# Altium PCB XDRONE.PcbDoc (part 1 of 2)
Units mm, origin at the board's own origin, x right, y up, seen from the top; angles counter-clockwise.
Board outline 106 x 156 mm, 4 copper layers (Top Layer, Signal Layer 2, Signal Layer 1, Bottom Layer), stack 1.586 mm thick; 129 components, 64 nets, 369 pads, 526 vias.
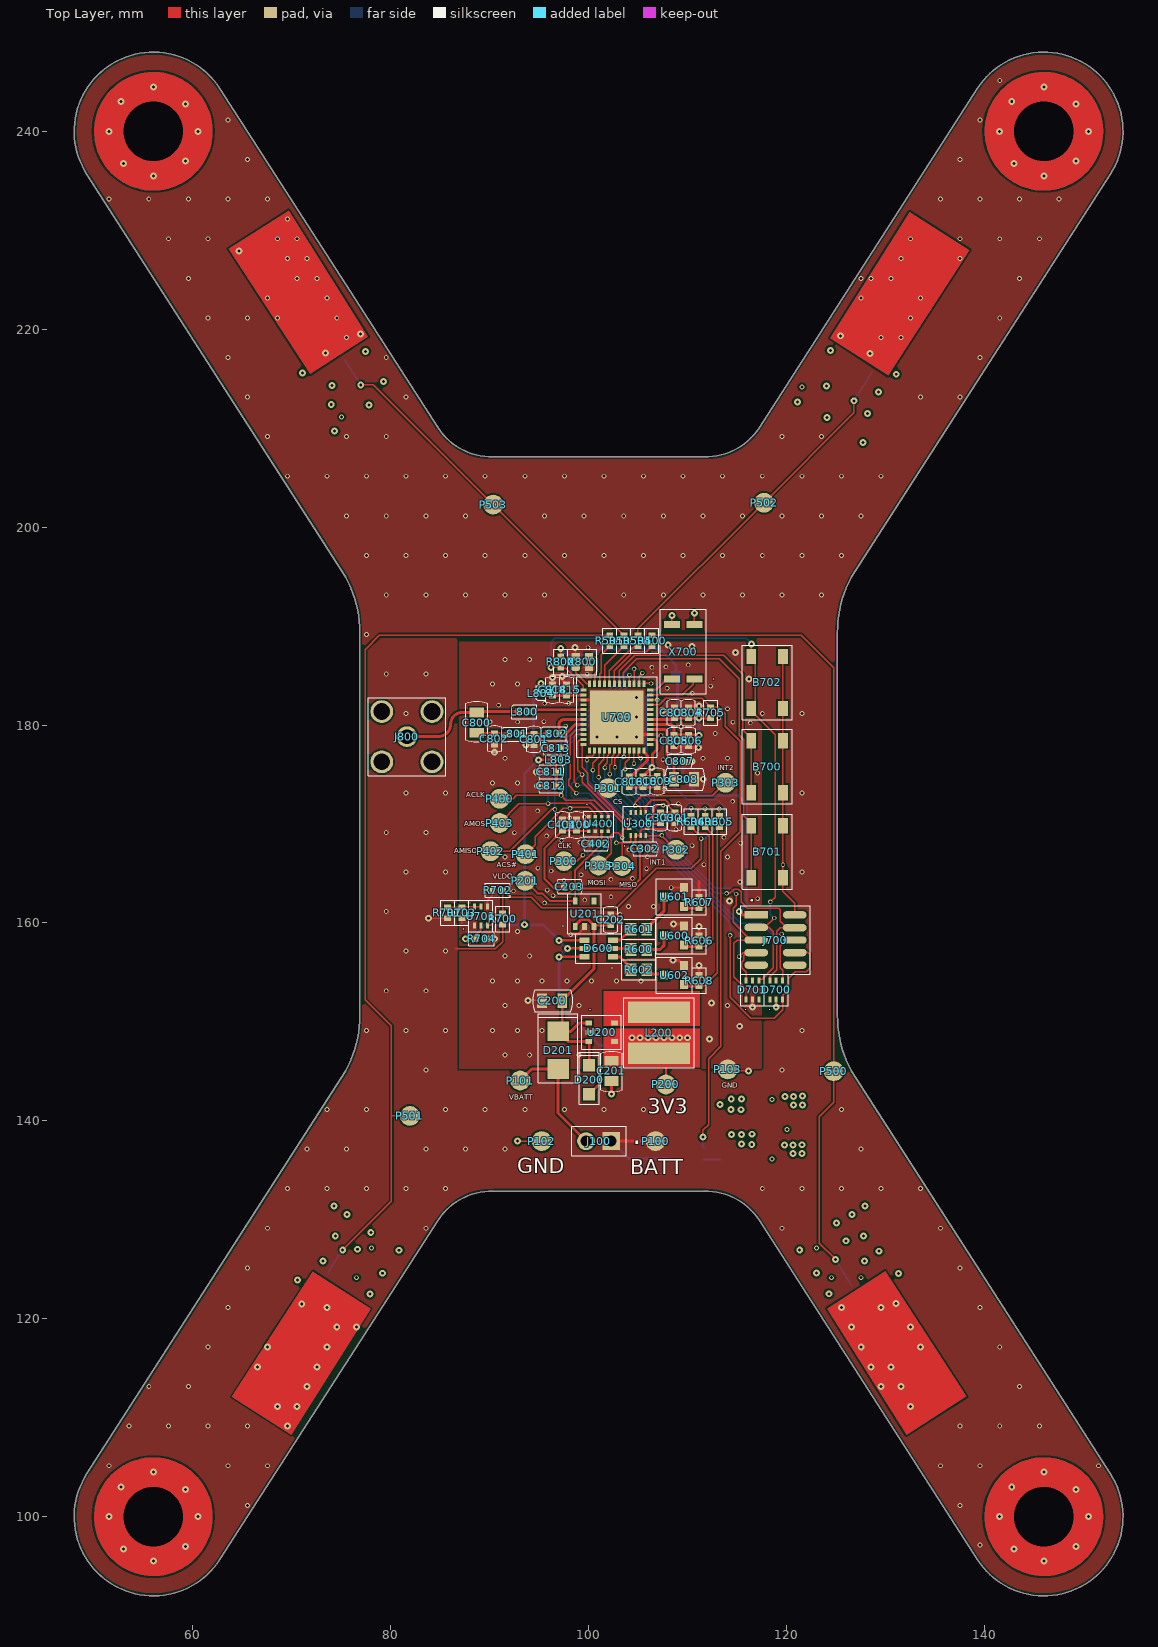
[diagram p0: Top Layer view]
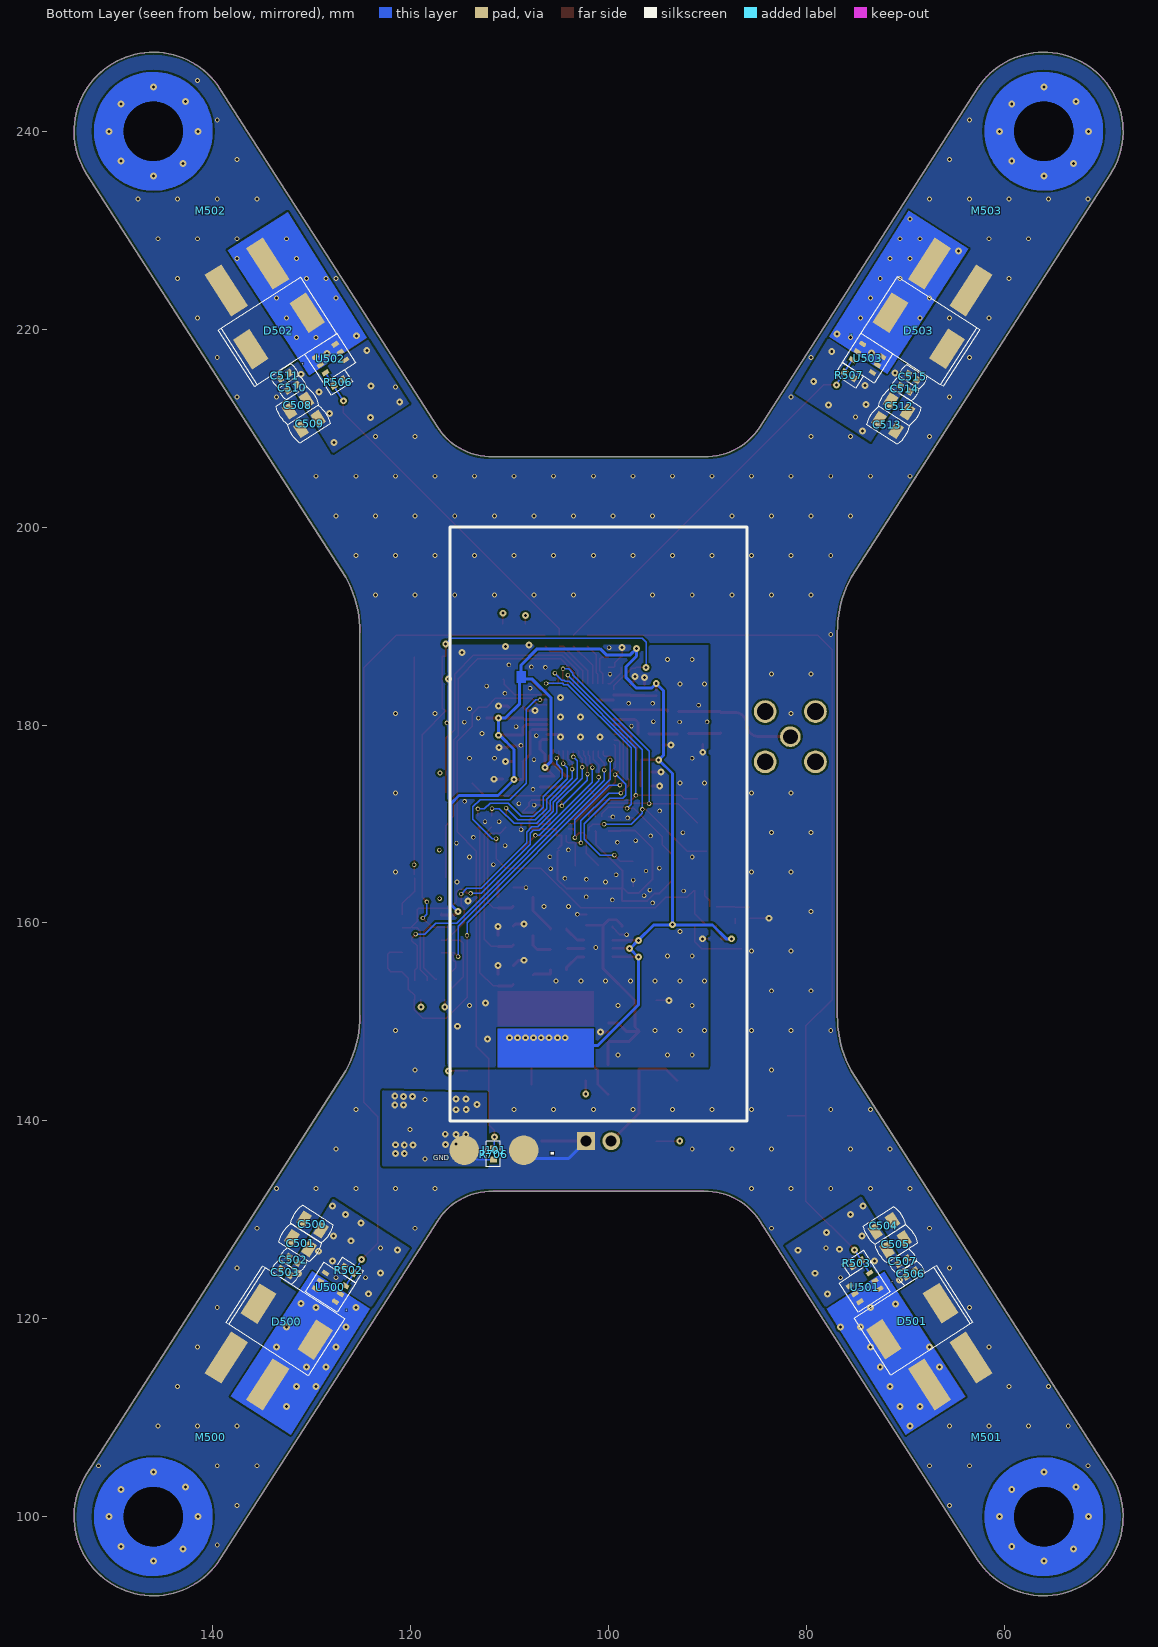
[diagram p1: Bottom Layer view, seen from below]
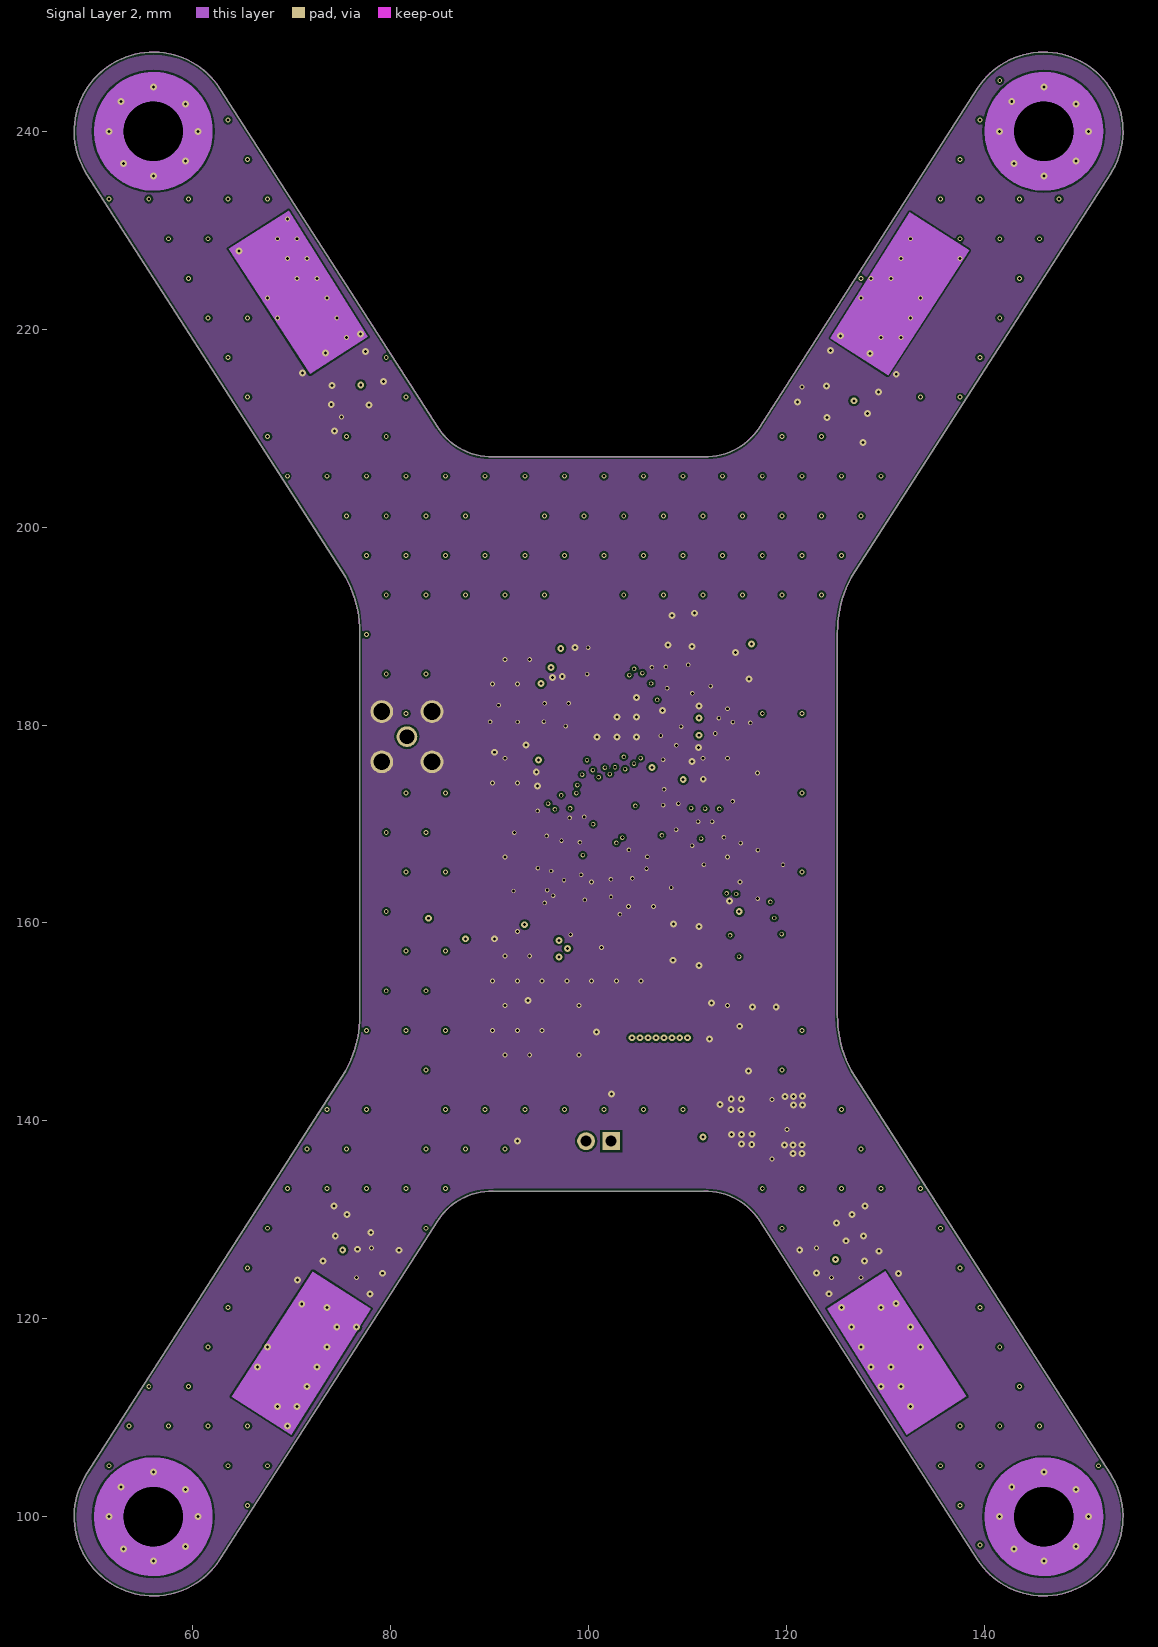
[diagram p2: Signal Layer 2]
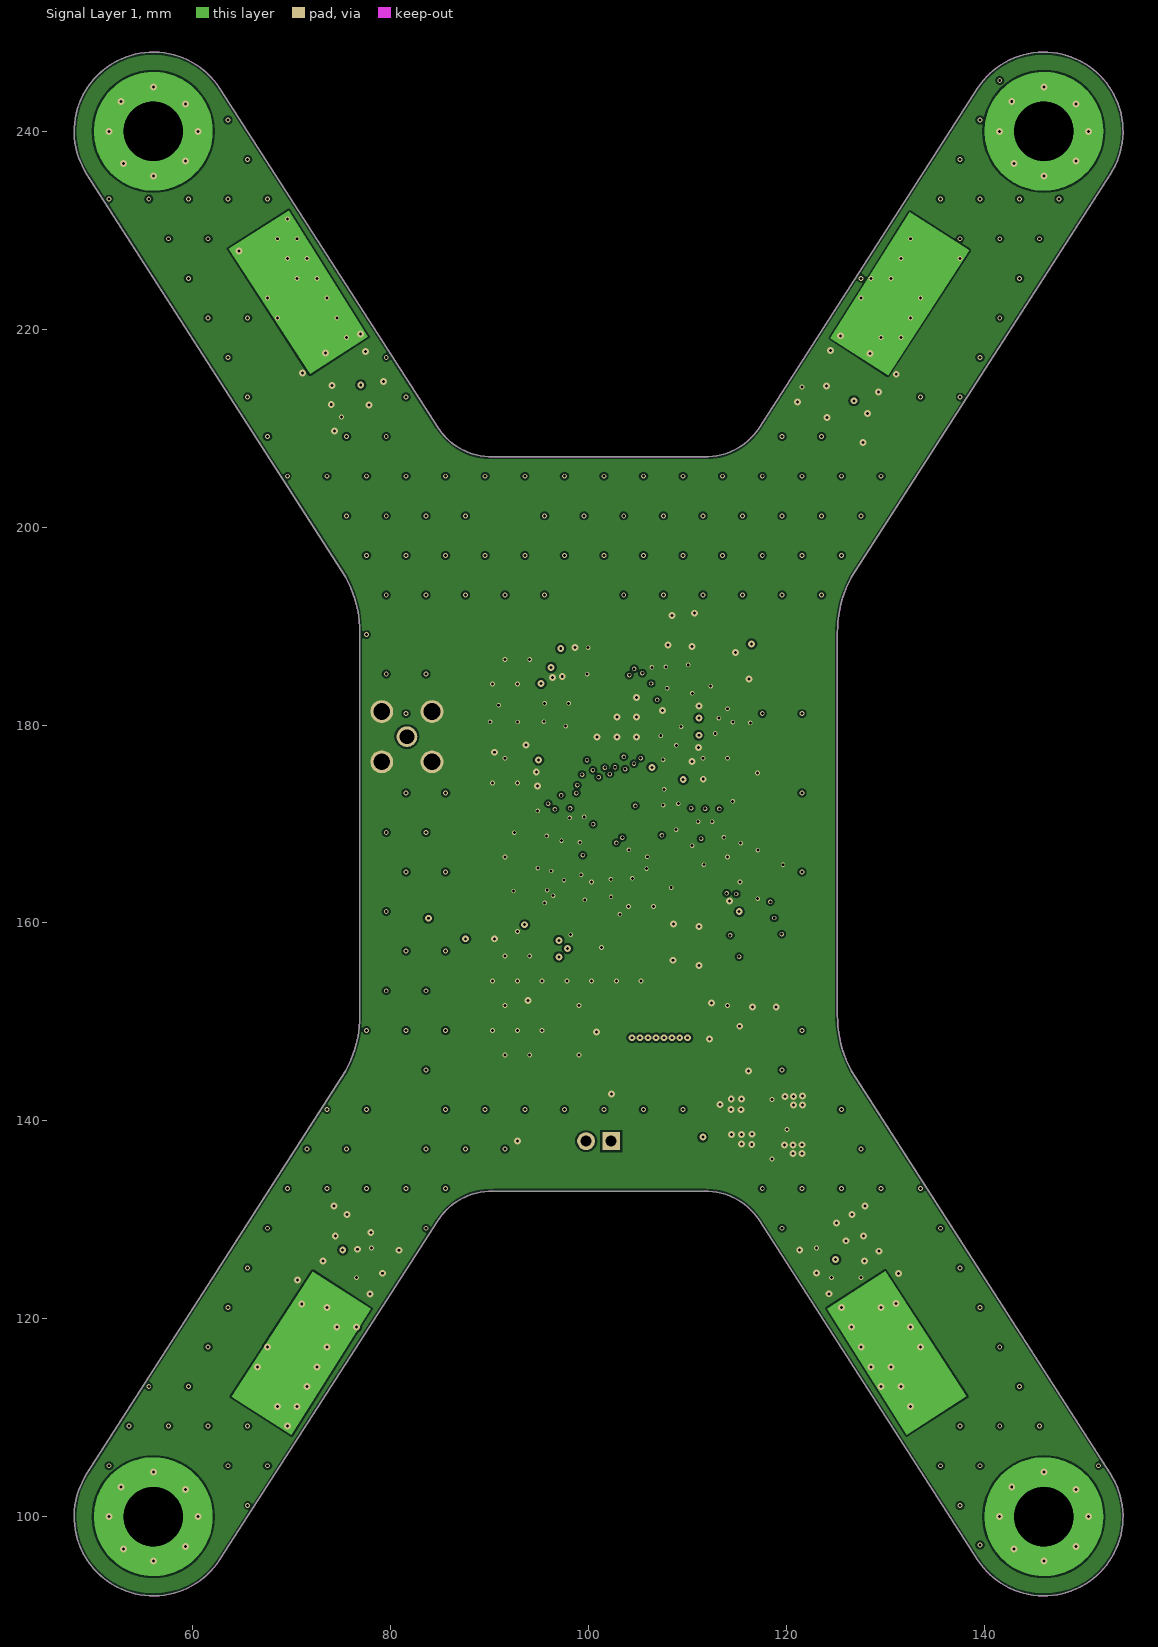
[diagram p3: Signal Layer 1]
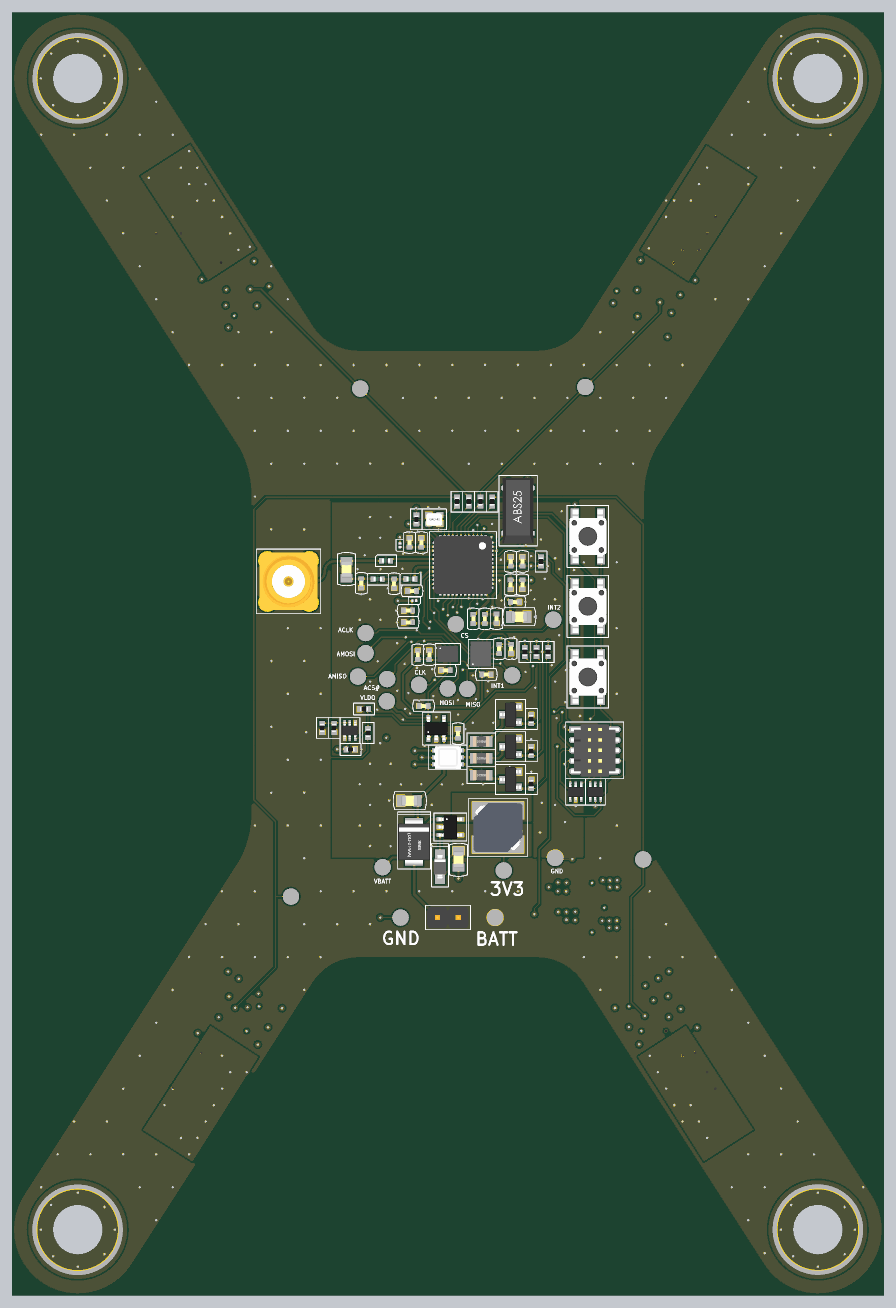
[diagram p5: 3D render of the assembled board from above, using the file's embedded part models]
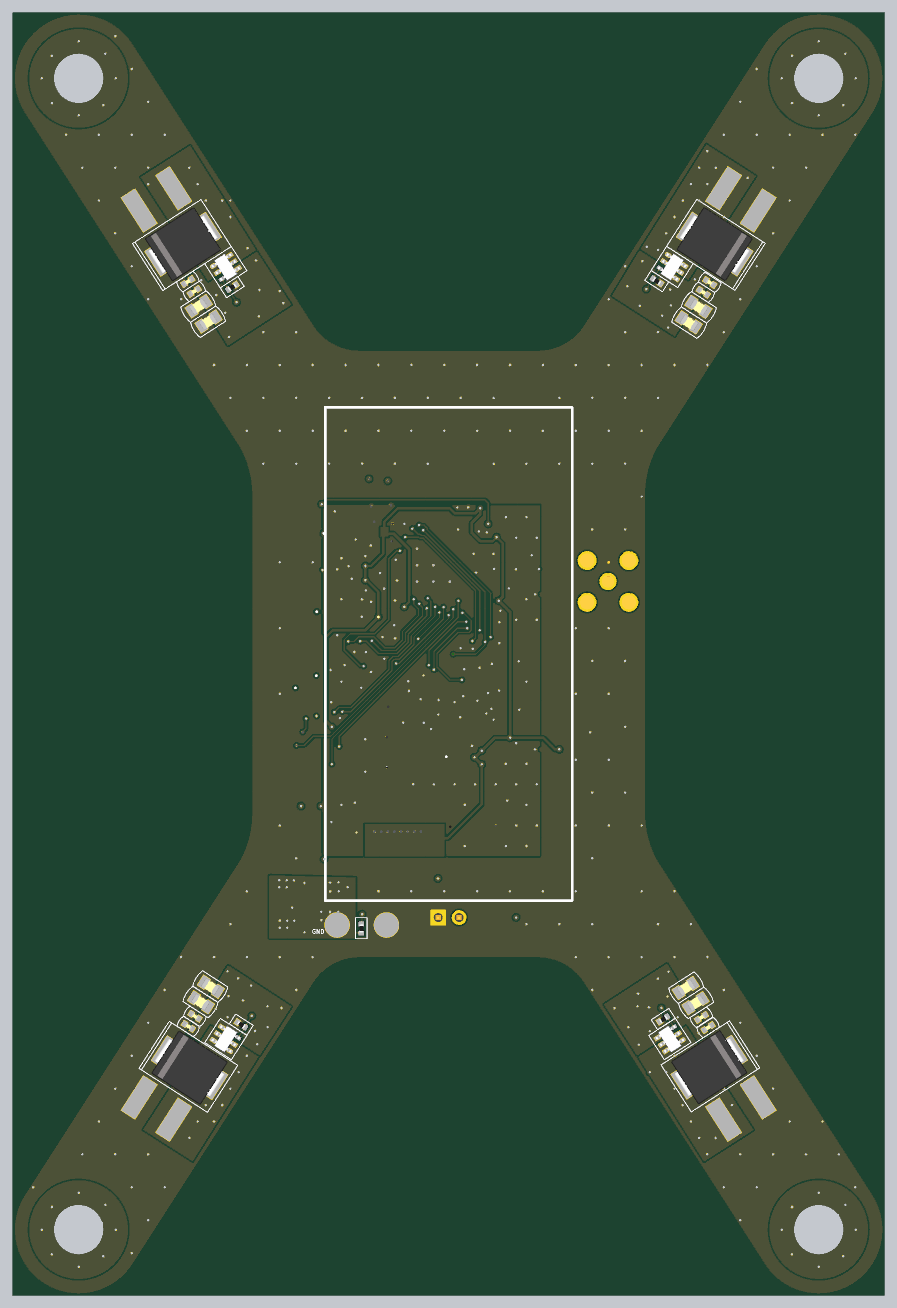
[diagram p6: 3D render of the assembled board from below, using the file's embedded part models]

## Layer stack, top to bottom
Top Solder: solder mask 0.0305, Solder Resist, Dk 3.8
Top Layer: signal copper 0.035
Dielectric 1: prepreg 0.2104, 7628*1, Dk 4.4
Signal Layer 2: signal copper 0.0152
Core: core 1.065, FR-4, Dk 4.6
Signal Layer 1: signal copper 0.0152
Dielectric 2: prepreg 0.2104, 7628*1, Dk 4.4
Bottom Layer: signal copper 0.035
Bottom Solder: solder mask 0.0305, Solder Resist, Dk 3.8

## Board outline
49.28,104.341 ccw(c56,100) 62.72,95.659 62.729,95.674 84.778,129.971 84.78,129.97 cw(c90.142,126.475) 90.352,132.872 111.648,132.872 cw(c111.858,126.475) 117.22,129.97 117.222,129.971 139.271,95.674 139.28,95.659 ccw(c146,100) 152.72,104.341 126.54,145.064 cw(c136.972,150.669) 125.13,150.67 125.13,189.33 cw(c136.972,189.331) 126.54,194.936 152.72,235.659 ccw(c146,240) 139.28,244.341 139.271,244.326 117.222,210.029 117.22,210.03 cw(c111.858,213.525) 111.648,207.128 90.352,207.128 cw(c90.142,213.525) 84.78,210.03 84.778,210.029 62.729,244.326 62.72,244.341 ccw(c56,240) 49.28,235.659 75.46,194.936 cw(c65.028,189.331) 76.87,189.33 76.87,150.67 cw(c65.028,150.669) 75.46,145.064

## Design rules (kind name [scope] priority, off if disabled: settings)
Clearance "Clearance Diff" [All] p1: gap=0.2 except(0.127: SMDPad-SMDPad)
ComponentClearance [All] p1: gap=0 collisioncheckmode=3 verticalgap=0.254 showdistances=FALSE
HoleSize [All] p1: absolutevalues=TRUE maxlimit=6.3 minlimit=0.3 maxpercent=80.000 minpercent=20.000
HoleToHoleClearance [All] p1: gap=0.5 allowstackedmicrovias=TRUE
MinimumAnnularRing "MinimumAnnularRing VIA" [IsVia] p1: minimumring=0.075
MinimumAnnularRing [All] p2: minimumring=0.3
MinimumSolderMaskSliver [All] p1: minsoldermaskwidth=0.08
PlaneConnect [All] p1: planeconnectstyle=Direct reliefexpansion=0.508 reliefentries=4 reliefconductorwidth=0.254 reliefairgap=0.254
PolygonConnect [All] p1: connectstyle=Direct reliefconductorwidth=0.254 reliefentries=4 polygonreliefangle="90 Angle" airgapwidth=0.254
RoutingVias [All] p1: holewidth=0.4 width=0.7 viastyle="Through Hole" minholewidth=0.3 minwidth=0.45 maxholewidth=1 maxwidth=2
SilkToSilkClearance [All] p1: silktosilkclearance=0
SilkToSolderMaskClearance [IsPad] p1: minsilkscreentomaskgap=0.15 clearancetoexposedcopper=TRUE
SolderMaskExpansion "SolderMaskExpansion MCU" [InComponent('U700')] p1: expansion=0.038
SolderMaskExpansion [All] p2: expansion=0.05
Width [All] p1: maxlimit=5 minlimit=0.09 preferedwidth=0.254
23 further rules are at their usual default settings.

## Classes and differential pairs
component class 01_XDRONE: J100 J101 P100 P101 P102 P103
component class U_02_POWER: C200 C201 C202 C203 D200 D201 L200 P200 P201 U200 U201
component class U_03_GYROSCOPE: C300 C301 C302 P300 P301 P302 P303 P304 P305 U300
component class U_04_ALTIMETER: C400 C401 C402 P400 P401 P402 P403 U400
component class U_05_MOTORS: C500 C501 C502 C503 C504 C505 C506 C507 C508 C509 C510 C511 C512 C513 C514 C515 D500 D501 D502 D503 M500 M501 M502 M503 P500 P501 P502 P503 R500 R501 R502 R503 R504 R505 R506 R507 U500 U501 U502 U503
component class U_06_LEDS: D600 R600 R601 R602 R603 R604 R605 R606 R607 R608 U600 U601 U602
component class U_07_MCU: B700 B701 B702 D700 D701 J700 R700 R701 R702 R703 R704 R705 R706 U700 U701 X700
component class U_08_MCU_POWER: C800 C801 C802 C803 C804 C805 C806 C807 C808 C809 C810 C811 C812 C813 C814 C815 C816 J800 L800 L801 L802 L803 L804 R800 X800

## Components (designator, comment, footprint, x,y, rotation, side; value= is the part's Value field where it differs from the comment)
B700 "BTN_1B_PTS647SK38SMTR2LFS" BTN_SMD 118.025,175.8 r270 top
B701 "BTN_1B_PTS647SK38SMTR2LFS" BTN_SMD 118.025,167.2 r270 top
B702 "BTN_1B_PTS647SK38SMTR2LFS" BTN_SMD 118.025,184.3 r270 top
C200 "4.7uF_10%_16V_0805_X7R_GRM21BR71C475KE51L" CAP_0805 96.3,152.15 r0 top
C201 "10uF_20%_6.3V_0805_X5R_JMK212BJ106MG-T" CAP_0805 102.3,145.05 r270 top
C202 "1uF_10%_35V_0402_GRM155R6YA105KE11J" CAP_0402 102.23,160.32 r270 top
C203 "1uF_10%_35V_0402_GRM155R6YA105KE11J" CAP_0402 98.05,163.67 r0 top
C300 "10uF_20%_6.3V_0402_GRM155R60J106ME05D" CAP_0402 107.25,170.625 r90 top
C301 "100nF_10%_16V_0402_GRM155R71C104KA88J" CAP_0402 108.7,170.625 r90 top
C302 "100nF_10%_16V_0402_GRM155R71C104KA88J" CAP_0402 105.68,167.5 r0 top
C400 "10uF_20%_6.3V_0402_GRM155R60J106ME05D" CAP_0402 98.75,169.9 r270 top
C401 "100nF_10%_16V_0402_GRM155R71C104KA88J" CAP_0402 97.35,169.9 r270 top
C402 "100nF_10%_16V_0402_GRM155R71C104KA88J" CAP_0402 100.725,168.025 r180 top
C500 "10uF_10%_10V_0805_X6S_GRM21BC81C106KA73L" CAP_0805 129.92,129.53 r32.73 bottom
C501 "10uF_10%_10V_0805_X6S_GRM21BC81C106KA73L" CAP_0805 131.12,127.64 r32.73 bottom
C502 "100nF_10%_16V_0402_GRM155R71C104KA88J" CAP_0402 131.85,125.95 r32.73 bottom
C503 "100pF_5%_50V_0402_CC0402JRNPO9BN101" CAP_0402 132.65,124.72 r32.73 bottom
C504 "10uF_10%_10V_0805_X6S_GRM21BC81C106KA73L" CAP_0805 72.18,129.38 r147.26 bottom
C505 "10uF_10%_10V_0805_X6S_GRM21BC81C106KA73L" CAP_0805 70.98,127.53 r147.26 bottom
C506 "100nF_10%_16V_0402_GRM155R71C104KA88J" CAP_0402 69.45,124.57 r147.26 bottom
C507 "100pF_5%_50V_0402_CC0402JRNPO9BN101" CAP_0402 70.26,125.81 r147.26 bottom
C508 "10uF_10%_10V_0805_X6S_GRM21BC81C106KA73L" CAP_0805 131.39,212.3 r327.26 bottom
C509 "10uF_10%_10V_0805_X6S_GRM21BC81C106KA73L" CAP_0805 130.2,210.44 r327.26 bottom
C510 "100nF_10%_16V_0402_GRM155R71C104KA88J" CAP_0402 131.94,214.1 r327.26 bottom
C511 "100pF_5%_50V_0402_CC0402JRNPO9BN101" CAP_0402 132.72,215.29 r327.26 bottom
C512 "10uF_10%_10V_0805_X6S_GRM21BC81C106KA73L" CAP_0805 70.63,212.21 r212.74 bottom
C513 "10uF_10%_10V_0805_X6S_GRM21BC81C106KA73L" CAP_0805 71.81,210.33 r212.74 bottom
C514 "100nF_10%_16V_0402_GRM155R71C104KA88J" CAP_0402 70.04,213.99 r212.74 bottom
C515 "100pF_5%_50V_0402_CC0402JRNPO9BN101" CAP_0402 69.25,215.18 r212.74 bottom
C800 "220pF_5%_50V_0805_C0G,NP0_QSCT251Q221J1GV001E" CAP_0805 88.675,180.25 r90 top
C801 "6.3pF_1.5%_50V_0402_CBR04C639B5GAC" CAP_0402 94.475,178.55 r90 top
C802 "2.1pF_5%_50V_0402_GJM1555C1H2R1BB01D" CAP_0402 90.475,178.6 r270 top
C803 "100nF_10%_16V_0402_GRM155R71C104KA88J" CAP_0402 108.65,181.25 r90 top
C804 "1uF_10%_35V_0402_GRM155R6YA105KE11J" CAP_0402 110.075,181.25 r90 top
C805 "1uF_10%_35V_0402_GRM155R6YA105KE11J" CAP_0402 108.625,178.425 r270 top
C806 "10nF_10%_6.3V_0402_CC0402KRX7R5BB103" CAP_0402 110.075,178.425 r270 top
C807 "100nF_10%_16V_0402_GRM155R71C104KA88J" CAP_0402 109.175,176.325 r0 top
C808 "2.7uF_10%_10V_0805_X5R_C0805C275K8PAC7800" CAP_0805 109.625,174.525 r0 top
C809 "10uF_20%_6.3V_0402_GRM155R60J106ME05D" CAP_0402 106.925,174.3 r270 top
C810 "100nF_10%_16V_0402_GRM155R71C104KA88J" CAP_0402 105.5,174.275 r270 top
C811 "100pF_5%_50V_0402_CC0402JRNPO9BN101" CAP_0402 96.175,175.275 r0 top
C812 "470nF_10%_6.3V_0402_GRM155C80J474KE19D" CAP_0402 96.175,173.85 r0 top
C813 "100pF_5%_50V_0402_CC0402JRNPO9BN101" CAP_0402 96.65,177.675 r0 top
C814 "1uF_10%_35V_0402_GRM155R6YA105KE11J" CAP_0402 96.35,183.55 r270 top
C815 "100pF_5%_50V_0402_CC0402JRNPO9BN101" CAP_0402 97.775,183.55 r270 top
C816 "1uF_10%_35V_0402_GRM155R6YA105KE11J" CAP_0402 104.1,174.275 r90 top
D200 "DIODE_30V_500mA_340mVf_CUS05S30,H3F" SOD-323 100.05,144.15 r90 top
D201 "DIODE_15V_1A_210mVf_VS-10BQ015HM3/5BT" DO-214AA 96.9,147.15 r270 top
D500 "DIODE_600V_8A_1Vf_S8JC" DO-214AB 132.51,119.7 r32.73 bottom
D501 "DIODE_600V_8A_1Vf_S8JC" DO-214AB 69.32,119.75 r147.26 bottom
D502 "DIODE_600V_8A_1Vf_S8JC" DO-214AB 133.3,219.825 r327.26 bottom
D503 "DIODE_600V_8A_1Vf_S8JC" DO-214AB 68.65,219.85 r212.74 bottom
D600 "LED_PLCC6_RGB_150352M173300" 6-PLCC 101.01,157.42 r180 top
D700 "ESD_D3V3F4U6S" "SOT-363 SC-70-6" 118.95,153.225 r90 top
D701 "ESD_D3V3F4U6S" "SOT-363 SC-70-6" 116.55,153.225 r90 top
J100 "CON_2x1PIN_ST_61300211121_2.54" CON_2x1PIN_RA_61300211121 101,137.95 r0 top
J101 "CON_2x1PIN_MALE_51005-0200" CON_2x1PIN_MOLEX_51005-0200 111.57,137.04 r270 bottom
J700 "CON_5x2PIN_RA_1.27_FTSH-105-01-L-DV-K" CON_5x2PIN_RA_FTSH-105-01-L-DV-K 118.875,158.275 r270 top
J800 "RF_63012002124503" RF_63012002124503 81.625,178.825 r90 top
L200 "10uH_30%_1.3A_CDRH5D28-100NC" IND_CDRH5D28 107.1,148.9 r270 top
L800 "18nH_2%_400mA_LQG15HS18NG02D" RF_IND_0402 93.475,181.35 r0 top
L801 "16nH_3%_400mA_MLG1005S16NHT000" RF_IND_0402 92.475,179.1 r0 top
L802 "4.2nH_5%_1.8A_LQW15AN4N2C8ZD" RF_IND_0402 96.45,179.125 r0 top
L803 "52nH_25%_750mA_BLM03PG330SN1" IND_0201 96.925,176.475 r180 top
L804 "110nH_50%_200mA_BLM03AG700SN1D" IND_0201 95.175,183.225 r90 top
M500 "BDC_1020_3.7V_4A" 1020_MOTOR 146,100 r122.73 bottom locked
M501 "BDC_1020_3.7V_4A" 1020_MOTOR 56,100 r57.27 bottom locked
M502 "BDC_1020_3.7V_4A" 1020_MOTOR 146,240 r237.26 bottom locked
M503 "BDC_1020_3.7V_4A" 1020_MOTOR 56,240 r302.74 bottom locked
P100 "TEST_POINT_2mm" TEST_POINT_2mm 106.75,137.95 r90 top
P101 "TEST_POINT_2mm" TEST_POINT_2mm 93.075,144.075 r90 top
P102 "TEST_POINT_2mm" TEST_POINT_2mm 95.25,137.95 r90 top
P103 "TEST_POINT_2mm" TEST_POINT_2mm 114.05,145.2 r90 top
P200 "TEST_POINT_2mm" TEST_POINT_2MM 107.8,143.675 r0 top
P201 "TEST_POINT_2mm" TEST_POINT_2mm 93.59,164.25 r90 top
P300 "TEST_POINT_2mm" TEST_POINT_2MM 97.5,166.25 r90 top
P301 "TEST_POINT_2mm" TEST_POINT_2MM 101.975,173.625 r90 top
P302 "TEST_POINT_2mm" TEST_POINT_2MM 108.825,167.4 r90 top
P303 "TEST_POINT_2mm" TEST_POINT_2MM 113.825,174.175 r90 top
P304 "TEST_POINT_2mm" TEST_POINT_2MM 103.375,165.75 r90 top
P305 "TEST_POINT_2mm" TEST_POINT_2MM 101,165.8 r90 top
P400 "TEST_POINT_2mm" TEST_POINT_2MM 91,172.55 r90 top
P401 "TEST_POINT_2mm" TEST_POINT_2MM 93.625,166.95 r90 top
P402 "TEST_POINT_2mm" TEST_POINT_2MM 90.075,167.25 r90 top
P403 "TEST_POINT_2mm" TEST_POINT_2MM 91,170.1 r90 top
P500 "TEST_POINT_2mm" TEST_POINT_2mm 124.76,145.02 r90 top
P501 "TEST_POINT_2mm" TEST_POINT_2mm 81.925,140.5 r90 top
P502 "TEST_POINT_2mm" TEST_POINT_2mm 117.72,202.47 r0 top
P503 "TEST_POINT_2mm" TEST_POINT_2mm 90.35,202.275 r0 top
R500 "RES_100R_1%_0402_RC0402FR-07100RL" RES_0402 106.4,188.525 r270 top
R501 "RES_100R_1%_0402_RC0402FR-07100RL" RES_0402 102.125,188.525 r270 top
R502 "RES_11k_5%_0402_ERJ-2GEJ113X" RES_0402 126.23,124.92 r32.73 bottom
R503 "RES_11k_5%_0402_ERJ-2GEJ113X" RES_0402 74.9,125.6 r327.26 bottom
R504 "RES_100R_1%_0402_RC0402FR-07100RL" RES_0402 104.975,188.525 r270 top
R505 "RES_100R_1%_0402_RC0402FR-07100RL" RES_0402 103.55,188.525 r270 top
R506 "RES_11k_5%_0402_ERJ-2GEJ113X" RES_0402 127.33,214.62 r147.26 bottom
R507 "RES_11k_5%_0402_ERJ-2GEJ113X" RES_0402 75.69,215.35 r212.74 bottom
R600 "RC_0805_340R_1/4W_1%_M" RES_0805 105.06,157.32 r180 top
R601 "RC_0805_340R_1/4W_1%_M" RES_0805 105.06,159.37 r180 top
R602 "RC_0805_340R_1/4W_1%_M" RES_0805 105.06,155.27 r180 top
R603 "RES_1k_1%_0402_RC0402FR-071KL" RES_0402 111.775,170.25 r90 top
R604 "RES_1k_1%_0402_RC0402FR-071KL" RES_0402 110.35,170.25 r90 top
R605 "RES_1k_1%_0402_RC0402FR-071KL" RES_0402 113.2,170.25 r90 top
R606 "RES_11k_5%_0402_ERJ-2GEJ113X" RES_0402 111.15,158.18 r90 top
R607 "RES_11k_5%_0402_ERJ-2GEJ113X" RES_0402 111.15,162.08 r90 top
R608 "RES_11k_5%_0402_ERJ-2GEJ113X" RES_0402 111.15,154.18 r90 top
R700 "RES_10k_1%_0402_RC0402FR-0710KL" RES_0402 91.3,160.4 r90 top
R701 "RES_1k_1%_0402_RC0402FR-071KL" RES_0402 85.725,161.025 r90 top
R702 "RES_10k_1%_0402_RC0402FR-0710KL" RES_0402 90.8,163.3 r180 top
R703 "RES_11k_5%_0402_ERJ-2GEJ113X" RES_0402 87.175,161.025 r270 top
R704 "RES_11k_5%_0402_ERJ-2GEJ113X" RES_0402 89.175,158.4 r0 top
R705 "RES_10k_1%_0402_RC0402FR-0710KL" RES_0402 112.325,181.25 r90 top
R706 "THER_10k_1%_0402_NTCG103JF103FT1" RES_0402 111.62,136.64 r270 bottom
R800 "RES_11k_5%_0402_ERJ-2GEJ113X" RES_0402 97.175,186.375 r270 top
U200 "DCDC_6VIN_3.3VOUT_600mA_TPS62203DBVR" "SC-74A-5 SOT-23-5" 101.3,148.95 r0 top
U201 "LDO_6Vin_3.3Vout_MIC5504-3.3YM5-TR" "SC-74A-5 SOT-23-5" 99.59,160.93 r90 top
U300 "GYRO_3D_3.6V_ACEL_ASM330LHH" LGA14 105,170 r90 top
U400 "BAR_4V_0.002hPA_500nA_DPS368XTSA1" DPS368XTSA1 101,170 r90 top
U500 "MOS_N_1G_20VDS_6.9A_0.65Vth_PMN16XNEX" TSSOP-6 128.1,123.175 r32.73 bottom
U501 "MOS_N_1G_20VDS_6.9A_0.65Vth_PMN16XNEX" TSSOP-6 74.1,123.175 r327.26 bottom
U502 "MOS_N_1G_20VDS_6.9A_0.65Vth_PMN16XNEX" TSSOP-6 128.11,217.04 r147.26 bottom
U503 "MOS_N_1G_20VDS_6.9A_0.65Vth_PMN16XNEX" TSSOP-6 73.82,217.07 r212.74 bottom
U600 "MOS_N_1G_0.3A_DMN2005K" SOT-23 108.625,158.73 r180 top
U601 "MOS_N_1G_0.3A_DMN2005K" SOT-23 108.625,162.63 r180 top
U602 "MOS_N_1G_0.3A_DMN2005K" SOT-23 108.625,154.73 r180 top
U700 "MCU_1MB_256kB_EFR32FG28A120F1024GM48-A" QFN48 102.85,180.8 r270 top
U701 "MOS_2G_50VDS_360mA_0.8Vth_DMN53D0LDW-7" "SOT-363 SC-70-6" 89.1,160.7 r90 top
X700 "QUARTZ_32.768kHz_20ppm_830016178" 4-SOJ 109.55,187.425 r90 top
X800 "QUARTZ_39MHz_10ppm_ECS-390-10-37B-CKM-TR" 4-SMD 99.35,186.375 r0 top

## Footprints (in the part's own frame and the unit in brackets; to place one, negate y for a bottom-side part, rotate by r counter-clockwise, add the part's x,y. Pads: shape width x height; smd on the part's side, far side on the other; paste and mask are expansions set on the pad)
4-SMD [mm] "4-SMD"
  rrect50% 0.85x0.75 smd: 1(-0.675,-0.525)
  rect 0.85x0.75 smd: 2(0.675,-0.525) 3(0.675,0.525) 4(-0.675,0.525)
  silkscreen extent -1.47,-1.27 1.48,1.28, body extent -1,-0.8 1,0.8, height 0.51
4-SOJ [mm] "4-SOJ"
  rect 0.7x1.6 smd: 1(-2.75,-1.15) 2(2.75,-1.15) 3(2.75,1.15) 4(-2.75,1.15)
  silkscreen extent -4.28,-2.32 4.28,2.32, body extent -4,-1.99 4,2.01, height 2.65
6-PLCC [mm] "6-PLCC"
  rect 1x0.55 smd: 1(-1.45,0.85) 2(1.45,0.85) 3(-1.45,0) 4(1.45,0) 5(-1.45,-0.85) 6(1.45,-0.85)
  silkscreen extent -2.32,-1.5 2.32,1.5, body extent -1.75,-1.4 1.75,1.4, height 1.85
1020_MOTOR [mm] "1020_Motor"
  round 0 hole 6 unplated: 0(0,0)
  rect 5x2 smd: 1(17.5,2.5) 2(17.5,-2.5)
BTN_SMD [mm] "BTN_SMD"
  rect 1.55x1 smd: 1(-2.625,1.6) 2(2.625,1.6) 3(-2.625,-1.6) 4(2.625,-1.6)
  silkscreen extent -3.77,-2.52 3.77,2.52, body extent -3.25,-2.25 3.25,2.25, height 3.8
CAP_0402 [mm] "CAP_0402"
  rect 0.6x0.7 smd: 1(-0.55,0) 2(0.55,0)
  silkscreen extent -1.32,-0.7 1.32,0.72, body extent -0.5,-0.25 0.5,0.25, height 0.5
CAP_0805 [mm] "CAP_0805"
  rect 1x1.45 smd: 1(-1.025,0) 2(1.025,0)
  silkscreen extent -1.95,-1.1 2.1,1.1, body extent -0.92,-0.62 1.08,0.63, height 0.63
CON_2x1PIN_MOLEX_51005-0200 [mm] "CON_2x1PIN_MOLEX_51005-0200"
  round 3 smd: 1(0,3) 2(0,-3)
CON_2x1PIN_RA_61300211121 [mm] "CON_2x1PIN_RA_61300211121"
  rect 1.8x1.8 hole 1.1: 1(1.27,0)
  round 1.8 hole 1.1: 2(-1.27,0)
  silkscreen extent -2.7,-1.48 2.78,1.5, body extent -2.54,-1.27 2.54,1.27, height 6.27
CON_5x2PIN_RA_FTSH-105-01-L-DV-K [mm] "CON_5x2PIN_RA_FTSH-105-01-L-DV-K"
  rect 0.75x2.4 smd: 1(-2.54,-1.95)
  oval 0.75x2.4 smd: 2(-2.54,1.95) 3(-1.27,-1.95) 4(-1.24,1.95) 5(0,-1.95) 6(0,1.95) 7(1.27,-1.95) 8(1.27,1.95) 9(2.54,-1.95) 10(2.54,1.95)
  silkscreen extent -3.45,-3.52 3.45,3.53, body extent -3.17,-2.93 3.18,2.92, height 6.26
DO-214AA [mm] "DO-214AA"
  rect 2x2.18 smd: 1(-1.9,0) 2(1.9,0)
  silkscreen extent -3.65,-2 3.3,2, body extent -2.75,-1.95 2.75,1.95, height 2.45
DO-214AB [mm] "DO-214AB"
  rect 2x3.6 smd: 1(3.4,0) 2(-3.4,0)
  silkscreen extent -4.77,-3.4 5.13,3.4, body extent -4.07,-3.12 4.08,3.13, height 2.65
DPS368XTSA1 [mm] "DPS368XTSA1"
  rect 0.35x0.35 smd paste-1: 1(0.725,0.975) 2(0.725,0.325) 3(0.725,-0.325) 4(0.725,-0.975) 5(-0.725,-0.975) 6(-0.725,-0.325) 7(-0.725,0.325) 8(-0.725,0.975)
  silkscreen extent -1.28,-1.53 1.28,1.53, body extent -1,-1.25 1,1.25, height 1
IND_0201 [mm] "IND_0201"
  rect 0.275x0.3 smd: 1(-0.262,0) 2(0.266,0)
  silkscreen extent -0.74,-0.48 0.74,0.48, body extent -0.32,-0.16 0.32,0.16, height 0.33
IND_CDRH5D28 [mm] "IND_CDRH5D28"
  rect 2.15x6.3 smd: 1(-2.075,0) 2(2.075,0)
  silkscreen extent -3.55,-3.55 3.55,3.55, body extent -3,-3 3,3, height 3
LGA14 [mm] "LGA14"
  rect 0.475x0.25 smd: 1(-1.162,0.75) 2(-1.162,0.25) 3(-1.162,-0.25) 4(-1.162,-0.75) 8(1.162,-0.75) 9(1.162,-0.25) 10(1.162,0.25) 11(1.162,0.75)
  rect 0.25x0.475 smd: 5(-0.5,-0.913) 6(0,-0.913) 7(0.5,-0.913) 12(0.5,0.913) 13(0,0.913) 14(-0.5,0.913)
  silkscreen extent -1.78,-1.53 1.78,1.53, body extent -1.5,-1.25 1.5,1.25, height 0.86
QFN48 [mm] "QFN48"
  rect 5.4x5.4 smd: 0(0,0)
  rect 0.65x0.3 smd: 1(-3.375,2.75) 2(-3.375,2.25) 3(-3.375,1.75) 4(-3.375,1.25) 5(-3.375,0.75) 6(-3.375,0.25) 7(-3.375,-0.25) 8(-3.375,-0.75) 9(-3.375,-1.25) 10(-3.375,-1.75) 11(-3.375,-2.25) 12(-3.375,-2.75) 25(3.375,-2.75) 26(3.375,-2.25) 27(3.375,-1.75) 28(3.375,-1.25) 29(3.375,-0.75) 30(3.375,-0.25) 31(3.375,0.25) 32(3.375,0.75) 33(3.375,1.25) 34(3.375,1.75) 35(3.375,2.25) 36(3.375,2.75)
  rect 0.3x0.65 smd: 13(-2.75,-3.375) 14(-2.25,-3.375) 15(-1.75,-3.375) 16(-1.25,-3.375) 17(-0.75,-3.375) 18(-0.25,-3.375) 19(0.25,-3.375) 20(0.75,-3.375) 21(1.25,-3.375) 22(1.75,-3.375) 23(2.25,-3.375) 24(2.75,-3.375) 37(2.75,3.375) 38(2.25,3.375) 39(1.75,3.375) 40(1.25,3.375) 41(0.75,3.375) 42(0.25,3.375) 43(-0.25,3.375) 44(-0.75,3.375) 45(-1.25,3.375) 46(-1.75,3.375) 47(-2.25,3.375) 48(-2.75,3.375)
  silkscreen extent -4.08,-4.08 4.08,4.08, body extent -3.58,-3.58 3.58,3.58, height 0.75
RES_0402 [mm] "RES_0402"
  rect 0.6x0.7 smd: 1(0.55,0) 2(-0.55,0)
  silkscreen extent -1.28,-0.72 1.28,0.7, body extent -0.5,-0.25 0.5,0.25, height 0.55
RES_0805 [mm] "RES_0805"
  rect 1.1x1.3 smd: 1(-0.8,0) 2(0.8,0)
  silkscreen extent -1.73,-1.02 1.73,1.03, body extent -1,-0.62 1,0.62, height 0.53
RF_63012002124503 [mm] "RF_63012002124503"
  round 2.3 hole 1.7: 1(-2.54,2.54) 2(2.54,2.54) 3(-2.54,-2.54) 4(2.54,-2.54)
  round 2.1 hole 1.5: 5(0,0)
  silkscreen extent -3.93,-3.93 3.93,3.93, body extent -3.5,-3.5 3.5,3.5, height 10.4
RF_IND_0402 [mm] "RF_IND_0402"
  rect 0.6x0.7 smd: 1(0.55,0) 2(-0.55,0)
  silkscreen extent -1.28,-0.72 1.28,0.7, body extent -0.5,-0.25 0.5,0.25, height 0.55
"SC-74A-5 SOT-23-5" [mm] "SC-74A-5 SOT-23-5"
  rect 0.7x0.5 smd: 1(-1.3,0.95) 2(-1.3,0) 3(-1.3,-0.95) 4(1.3,-0.95) 5(1.3,0.95)
  silkscreen extent -2,-1.7 2,1.7, body extent -1.41,-1.45 1.41,1.45, height 1.17
SOD-323 [mm] "SOD-323"
  rect 1.25x1.22 smd: 1(1.475,0) 2(-1.475,0)
  silkscreen extent -2.47,-1.02 2.78,1.03, body extent -1.42,-0.75 1.43,0.75, height 1.16
SOT-23 [mm] "SOT-23"
  rect 0.8x0.9 smd: 1(-1,0.95) 2(-1,-0.95) 3(1,0)
  silkscreen extent -1.83,-1.83 1.83,1.83, body extent -1.25,-1.5 1.25,1.5, height 1.2
"SOT-363 SC-70-6" [mm] "SOT-363 / SC-70-6"
  rect 0.6x0.3 smd: 1(-0.95,0.65) 2(-0.95,0) 3(-0.95,-0.65) 4(0.95,-0.65) 5(0.95,0) 6(0.95,0.65)
  silkscreen extent -1.6,-1.2 1.6,1.2, body extent -1,-1 1,1, height 1.05
TEST_POINT_2mm [mm] "TEST POINT_2mm"
  round 2 smd: 1(0,0)
TEST_POINT_2MM [mm] "TEST POINT_2mm"
  round 2 smd: 1(0,0)
TSSOP-6 [mm] "TSSOP-6"
  rrect70% 0.7x0.45 smd: 1(-1.2,0.95)
  rect 0.7x0.45 smd: 2(-1.2,0) 3(-1.2,-0.95) 4(1.2,-0.95) 5(1.2,0) 6(1.2,0.95)
  silkscreen extent -1.93,-1.75 1.93,1.75, body extent -1.38,-1.47 1.37,1.48, height 1.02

## Part data
B700 B701 B702: "Button PTS647SK38SMTR2LFS"
C200: "CAP 4.7uF 10% 16V 0805 X7R"
C201: "CAP 10uF 20% 6.3V 0805 X5R"
C202 C203 C804 C805 C814 C816: "CAPACITOR 1uF 10% X5R 0402"
C300 C400 C809: library part "10uF 20% 6.3V 0402 GRM155R60J106ME05D", "CAPACITOR 10uF 20% 6.3V 0402 GRM155R60J106ME05D"
C301 C302 C401 C402 C502 C506 C510 C514 C803 C807 C810: "CAPACITOR 100nF 10% X7R 0402"
C500 C501 C504 C505 C508 C509 C512 C513: "CAP 10uF 10% 10V 0805 X6S"
C503 C507 C511 C515 C811 C813 C815: "CAPACITOR 100pF 5% 50V 0402 CC0402JRNPO9BN101"
C800: "CAP 220pF 5% 50V 0805 C0G,NP0"
C801: "CAPACITOR 6.3pF 1.5% 50V 0402 CBR04C639B5GAC"
C802: "CAPACITOR 2.1pF 5% 50V 0402 GJM1555C1H2R1BB01D"
C806: "CAPACITOR 10nF 10% 6.3V 0402 CC0402KRX7R5BB103"
C808: "CAP 2.7uF 10% 10V 0805 X5R C0805C275K8PAC7800"
C812: "CAPACITOR 470nF 10% 6.3V 0402 GRM155C80J474KE19D"
D200: "DIODE 30V 500mA 340mVf CUS05S30,H3F"
D201: "DIODE 15V 1A 210mVf VS-10BQ015HM3/5BT"
D500 D501 D502 D503: "DIODE 600V 8A 1Vf S8JC"
D600: "CBI LED RGB PLCC6 150352M173300"
D700 D701: "4 CH ESD PROTECTION SOT363 LOW CAP D3V3F4U6S"
J100: "CONNECTOR 2x1 PIN ST 61300211121 WE 2.54 PITCH"
J101: "CONNECTOR 2x1PIN MALE 51005-0200"
J700: "CONNECTOR 5x2PIN RA 1.27 PITCH FTSH-105-01-L-DV-K"
J800: "RF Connector 63012002124503"
L200: "INDUCTOR 10uH 30% 1.3A CDRH5D28-100NC"
L800: "INDUCTOR 18nH 2% 400mA LQG15HS18NG02D"
L801: "INDUCTOR 16nH 3% 400mA MLG1005S16NHT000"
L802: "INDUCTOR 4.2nH 5% 1.8A LQW15AN4N2C8ZD"
L803: "INDUCTOR 52uH 25% 750mA BLM03PG330SN1"
L804: library part "110nH 50% 200mA BLM03AG700SN1D", "INDUCTOR 110nH 50% 200mA BLM03AG700SN1D"
M500 M501 M502 M503: "Brushed DC motor 3.7V"
R500 R501 R504 R505: "RESISTOR 100R 1% 0402 RC0402FR-07100RL"
R502 R503 R506 R507 R606 R607 R608 R703 R704 R800: "RESISTOR 11k 5% 0402 ERJ-2GEJ113X"
R600 R601 R602: "RESISTOR SMD 0805 340R 1/4W 1% METAL"
R603 R604 R605 R701: "RESISTOR 1k 1% 0402 RC0402FR-071KL"
R700 R702 R705: "RESISTOR 10k 1% 0402 RC0402FR-0710KL"
R706: "THERMISTANCE 10k 1% 0402 NTCG103JF103FT1"
U200: library part DCDC_5VIN_3.3VOUT_1A_TPS62203DBVR, "DCDC 2-5Vin 3.3Vout 1A 300mA TPS62203DBVR"
U201: "LDO 6Vin 3.3Vout MIC5504-3.3YM5-TR"
U300: "Gyroscope and accelerometer 3D 3.6V ASM330LHH"
U400: "BAROMETRIC SENSOR 4V 0.002hPA 500nA DPS368XTSA1"
U500 U501 U502 U503: "MOS N 1G 20VDS 6.9A 0.65Vth PMN16XNEX"
U600 U601 U602: "TRANSISTOR MOSFET N 0.3A 20V"
U700: "MCU 1MB 256kB EFR32FG28A120F1024GM48-A"
U701: "MOS 2GATES 50VDS 360mA 0.8Vth"
X700: "QUARTZ 32.768kHz 20ppm 830016178"
X800: "QUARTZ 39MHz 10ppm ECS-390-10-37B-CKM-TR"

## Via types
v1: diameter 0.5, hole 0.3, Top Layer to Bottom Layer, tented both sides, 240 vias
v2: diameter 0.7, hole 0.3, Top Layer to Bottom Layer, tented both sides, 186 vias
v3: diameter 0.45, hole 0.3, Top Layer to Bottom Layer, tented both sides, 100 vias

## Nets (pads, with @x,y where several pads share a name; then routed paths per layer and width w, separated by ;. In a path a pad name is that pad's centre, name@x,y a point inside that pad or via, vN(x,y) a via of type N, cw(c..) or ccw(c..) an arc to the next point about the centre after c; other vN are vias at no path point)
3V3: C201.1 C803.1 C804.1 C805.1 C806.1 C807.1 C808.1 C809.1 C810.1 C811.2 C812.2 D200.2 D600.2 D600.4 D600.6 J700.1 L200.2 L803.2 L804.2 P200.1 R704.2 R705.2 R800.2 U200.4 U700.38 U700.40 U700.41 U700.42 U701.2 | length 165.4
  Top Layer w0.15: R704.2@88.625,158.4 88.625,158.793 89.1,159.268 U701.2@89.1,159.75 ; R800.2@97.175,186.925 v2(97.175,187.725)
  Top Layer w0.2: L200.2@107.1,146.825 107.8,146.125 P200.1@107.8,143.675
  Top Layer w0.25: v2(94.925,176.475) L803.2@96.659,176.475 C811.2@96.659,175.341 ; L804.2@95.175,183.491 v2(95.175,184.2)
  Top Layer w0.254: v2(96.985,156.57) D600.2@99.56,156.57 ; v2(96.985,158.245) D600.6@99.56,158.245 ; v2(97.86,157.42) D600.4@99.56,157.42 ; D200.2@100.05,142.675 101.1,143.725 101.1,145.15 102.025,146.075 C201.1@102.3,146.075
  Top Layer w0.3: v2(87.55,158.4) R704.2@88.625,158.4 ; C812.2@96.725,173.85 C811.2@96.725,175.275 ; U700.38@106.225,178.55 106.695,178.55 106.9,178.345 106.9,177.53 106.44,177.07 106.44,175.765 v2(106.4,175.725) C810.1@105.5,174.825 C809.1@106.9,174.825 ; U700.40@106.225,179.55 107.725,179.55 107.925,179.35 107.925,177.025 C807.1@108.625,176.325 108.6,176.3 C808.1@108.6,174.525 108.625,174.5 v2(109.55,174.5) ; U700.41@106.225,180.05 108.35,180.05 108.625,179.775 C805.1@108.625,178.975 C806.1@110.075,178.975 v2@111.125,178.975 ; U700.42@106.225,180.55 108.5,180.55 C803.1@108.65,180.7 C804.1@110.075,180.7 v2(111.125,180.7) R705.2@112.325,180.7 ; v2(115.21,161.14) 115.57,160.78 116.89,160.78 J700.1@116.925,160.815 J700.1@116.857,160.883
  Bottom Layer w0.25: v2(93.53,159.82) v2@93.55,159.8
  Bottom Layer w0.3: v2(87.55,158.4) 88.1,158.4 89.5,159.8 93.55,159.8 95.43,159.8 v2(96.985,158.245) 97.81,157.42 v2(97.86,157.42) 97.01,156.57 v2(96.985,156.57) 96.985,151.705 101.08,147.61 102.15,147.61 102.48,147.28 ; v2(93.53,159.82) 93.53,175.095 94.91,176.475 v2(94.925,176.475) 94.42,176.98 94.42,183.445 v2(95.175,184.2) 95.645,183.73 97.16,183.73 98.21,184.78 98.21,185.92 97.175,186.955 v2(97.175,187.725) 97.8,187.1 100.24,187.1 100.84,187.7 107.2,187.7 108.83,186.07 108.83,184.91 ; v2(106.4,175.725) 105.825,176.3 105.825,177.075 105.82,177.08 105.82,182.76 107.7,184.64 108.56,184.64 108.83,184.91 ; v2(115.21,161.14) 115.935,161.865 115.935,172.055 115.115,172.875 111.175,172.875 v2(109.55,174.5) 109.55,177.525 110.995,178.97 v2(111.125,178.97) v2(111.125,180.7) 110.43,180.7 108.98,182.15 108.98,184.76 108.83,184.91
  other v2: 104.375,148.4 105.175,148.4 106,148.4 106.8,148.4 107.6,148.4 108.4,148.4 109.2,148.4 110,148.4
3V3_LDO: C203.2 C300.2 C301.2 C302.1 C400.2 C401.2 C402.1 P201.1 U201.5 U300.2 U300.3 U300.5 U300.8 U400.6 U400.8 | length 49.5
  Top Layer w0.2: P201.1@93.59,164.25 94.845,162.995 95.315,162.995 96.08,162.23 U201.5@98.64,162.23 C203.2@98.64,163.63 ; U400.8@100.025,169.275 98.825,169.275 C400.2@98.75,169.35 C401.2@97.35,169.35 95.55,167.55 95.55,164.44 96.97,163.02 97.99,163.02 98.6,163.63 C203.2@98.6,163.67 ; U400.6@101.325,169.275 101.275,169.225 C402.1@101.275,168.025 101.275,167.975 98.6,165.3 C203.2@98.6,163.67 ; C302.1@105.01,167.34 105.16,167.19 105.16,164.39 104.27,163.5 98.77,163.5 C203.2@98.64,163.63 ; C302.1@105.13,167.5 104.75,167.88 U300.2@104.75,168.838 U300.3@105.25,168.838 105.25,169.32 105.43,169.5 U300.5@105.913,169.5 105.913,169.475 107.724,169.475 107.98,169.731 107.98,170.445 C300.2@107.25,171.175 C301.2@108.7,171.175 108.045,171.83 108.045,172.127 107.737,172.435 106.375,172.435 105.75,171.81 U300.8@105.75,171.162 U300.8@105.762,171.175 ; C203.2@98.6,163.67 C203.2@98.64,163.63
ALTIMETER_CLK: P400.1 U400.4 U700.2 | length 29.5
  Top Layer w0.15: P400.1@91,172.55 92.35,172.55 92.7,172.9 v3(97.225,172.9) 97.7,172.425 100.55,172.425 101.975,171 U400.4@101.975,170.725 ; U700.2@105.125,184.2 U700.2@105.1,184.175 105.1,184.925 v3(105.425,185.25)
  Bottom Layer w0.15: v3@97.225,172.925 97.225,177.68 103.97,184.425 104.359,184.425 104.484,184.55 104.725,184.55 v3(105.425,185.25)
ALTIMETER_CS#: P401.1 U400.2 U700.1 | length 28.5
  Top Layer w0.15: P401.1@93.625,166.95 94.575,167.9 94.575,168.725 97.425,171.575 v3(98.125,171.575) 98.225,171.675 100.05,171.675 100.675,171.05 U400.2@100.675,170.725 ; U700.1@105.6,184.375 U700.1@105.6,184.175 105.625,184.2 v3(106.3,184.2)
  Bottom Layer w0.15: v3(98.125,171.575) 97.725,171.975 97.725,177.685 104.115,184.075 104.504,184.075 104.629,184.2 v3(106.3,184.2)
ALTIMETER_MISO: P402.1 U400.5 U700.4 | length 32.5
  Top Layer w0.15: P402.1@90.075,167.25 92.025,167.25 96.25,171.475 v3(96.575,171.475) ; v3(100.45,169.975) 101.6,169.975 101.975,169.6 U400.5@101.975,169.275 ; U700.4@104.1,184.175 v3(104.1,185.05)
  Bottom Layer w0.15: v3@100.425,170 100.4,169.975 97.693,169.975 96.575,171.093 v3(96.575,171.475) 96.575,177.525 v3(104.1,185.05)
ALTIMETER_MOSI: P403.1 U400.3 U700.3 | length 30.9
  Top Layer w0.15: P403.1@91,170.1 92.95,172.05 v3(95.9,172.05) 95.925,172.075 100.225,172.075 101.325,170.975 U400.3@101.325,170.725 ; U700.3@104.6,184.175 104.6,185.175 v3(104.6,185.675)
  Bottom Layer w0.15: v3(95.9,172.05) 95.9,177.34 95.875,177.365 103.6,185.09 103.6,185.257 104.018,185.675 v3(104.6,185.675)
BATT: C500.2 C501.2 C502.2 C503.2 C504.2 C505.2 C506.2 C507.2 C508.2 C509.2 C510.2 C511.2 C512.2 C513.2 C514.2 C515.2 D500.1 D501.1 D502.1 D503.1 J100.1 J101.1 M500.1 M501.2 M502.2 M503.1 P100.1 R700.2 R701.2 | length 19.7
  Top Layer w0.15: v2(83.8,160.475) R701.2@85.725,160.475 ; 86.51,157.4 90.575,157.4 91.3,158.125 R700.2@91.3,159.85
  Top Layer w0.3: J100.1@102.27,137.95 P100.1@106.75,137.95
  Bottom Layer w0.3: J100.1@102.27,137.95 104.02,136.2 J101.1@108.025,136.2
  other v1: 139.539,97.146 65.539,101.146 137.539,101.146 51.539,105.146 63.539,105.146 67.539,105.146 135.539,105.146 139.539,105.146 151.539,105.146 53.539,109.146 57.539,109.146 61.539,109.146 65.539,109.146 137.539,109.146 141.539,109.146 145.539,109.146 55.539,113.146 59.539,113.146 143.539,113.146 61.539,117.146 141.539,117.146 63.539,121.146 139.539,121.146 65.539,125.146 137.539,125.146 67.539,129.146 83.539,129.146 119.539,129.146 135.539,129.146 69.539,133.146 73.539,133.146 77.539,133.146 81.539,133.146 85.539,133.146 117.539,133.146 121.539,133.146 125.539,133.146 129.539,133.146 133.539,133.146 71.539,137.146 75.539,137.146 83.539,137.146 87.539,137.146 91.539,137.146 127.539,137.146 73.539,141.146 77.539,141.146 85.539,141.146 89.539,141.146 93.539,141.146 97.539,141.146 101.539,141.146 105.539,141.146 109.539,141.146 125.539,141.146 83.539,145.146 119.539,145.146 77.539,149.146 81.539,149.146 85.539,149.146 121.539,149.146 79.539,153.146 83.539,153.146 81.539,157.146 85.539,157.146 79.539,161.146 81.539,165.146 85.539,165.146 121.539,165.146 79.539,169.146 83.539,169.146 81.539,173.146 85.539,173.146 121.539,173.146 81.539,181.146 117.539,181.146 121.539,181.146 79.539,185.146 83.539,185.146 77.539,189.146 79.539,193.146 83.539,193.146 87.539,193.146 91.539,193.146 95.539,193.146 103.539,193.146 107.539,193.146 111.539,193.146 115.539,193.146 119.539,193.146 123.539,193.146 77.539,197.146 81.539,197.146 85.539,197.146 89.539,197.146 93.539,197.146 97.539,197.146 101.539,197.146 105.539,197.146 109.539,197.146 113.539,197.146 117.539,197.146 121.539,197.146 125.539,197.146 75.539,201.146 79.539,201.146 83.539,201.146 87.539,201.146 95.539,201.146 99.539,201.146 103.539,201.146 107.539,201.146 111.539,201.146 115.539,201.146 119.539,201.146 123.539,201.146 127.539,201.146 69.539,205.146 73.539,205.146 77.539,205.146 81.539,205.146 85.539,205.146 89.539,205.146 93.539,205.146 97.539,205.146 101.539,205.146 105.539,205.146 109.539,205.146 113.539,205.146 117.539,205.146 121.539,205.146 125.539,205.146 129.539,205.146 67.539,209.146 75.539,209.146 79.539,209.146 119.539,209.146 123.539,209.146 65.539,213.146 81.539,213.146 133.539,213.146 137.539,213.146 63.539,217.146 79.539,217.146 139.539,217.146 61.539,221.146 65.539,221.146 141.539,221.146 59.539,225.146 127.539,225.146 143.539,225.146 57.539,229.146 61.539,229.146 137.539,229.146 141.539,229.146 145.539,229.146 51.539,233.146 55.539,233.146 59.539,233.146 63.539,233.146 67.539,233.146 135.539,233.146 139.539,233.146 143.539,233.146 147.539,233.146 65.539,237.146 137.539,237.146 63.539,241.146 139.539,241.146 141.539,245.146
BTN0: B700.3 B700.4 U700.6 | length 27.5
  Top Layer w0.15: U700.6@103.1,184.175 103.1,185.5 104.3,186.7 104.304,186.7 104.654,187.05 113.65,187.05 115.55,185.15 115.55,179.55 116.425,178.675 B700.3@116.425,178.425 B700.4@116.425,173.175
BTN1: B701.3 B701.4 U700.5 | length 34.9
  Top Layer w0.15: U700.5@103.6,184.175 103.551,184.224 103.551,184.715 103.475,184.791 103.475,185.309 103.841,185.675 103.85,185.675 104.85,186.675 113.208,186.675 115.2,184.683 115.2,178.955 115.65,178.505 115.65,170.85 116.125,170.375 116.125,170.125 B701.3@116.425,169.825 B701.4@116.425,164.575